# Allegro board proiectcef.brd
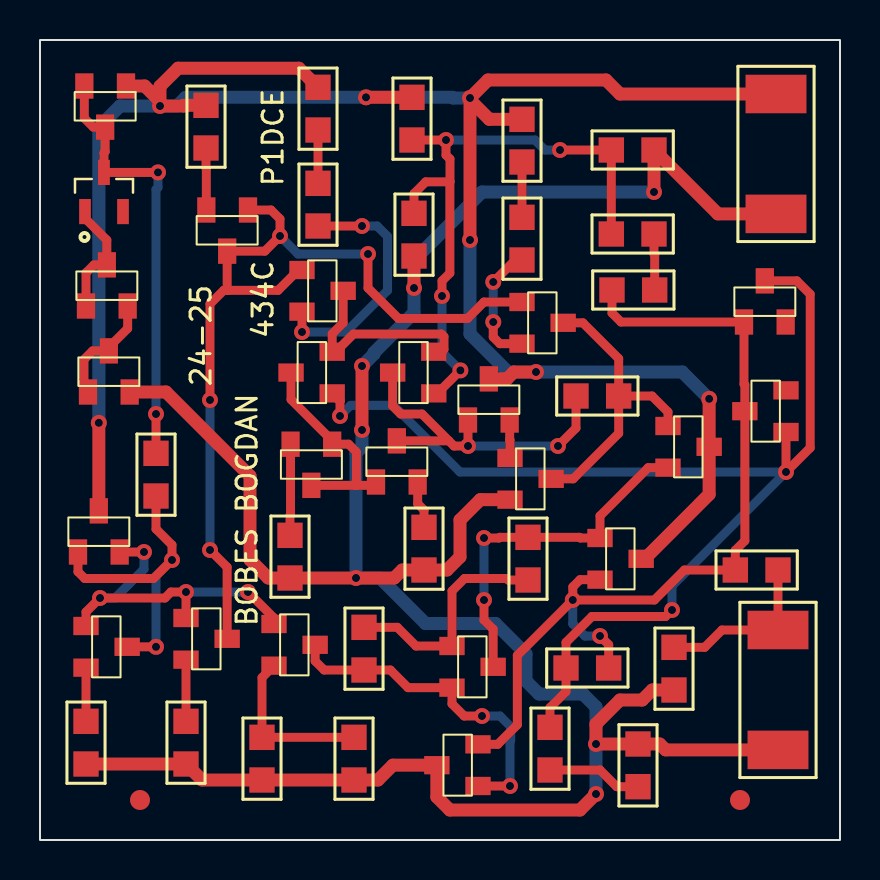
[diagram p0: board, top side]
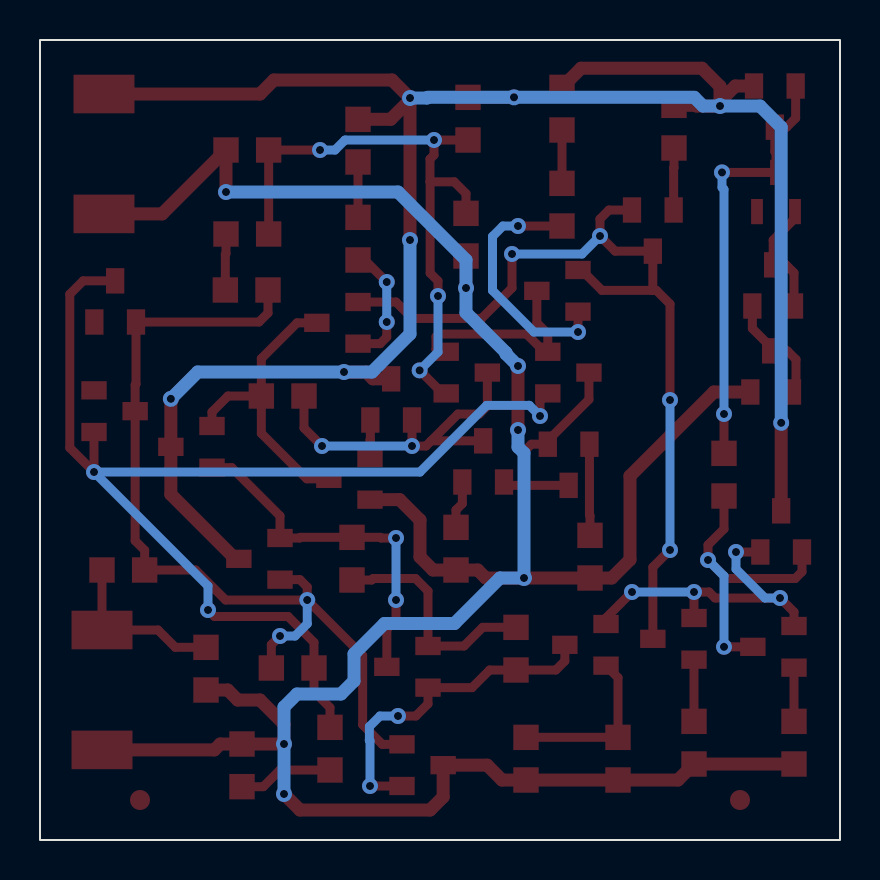
[diagram p1: board, bottom side, seen from below]

Outline 40 x 40 mm; copper layers: TOP, BOTTOM. Coordinates in mm from the lower left corner of the outline.
Outline path: rectangle 0,0 40,40

## Design rules (mm)
nets with their own width: min track width 0.45; nets N09865 N09869 N09873 N09931 N09951 N09955 N10001 N10083 N10129 N10137 N10265 N10327 N10339 N10355 N10375 N10397 N10485 N10501 N10617 N10621 N10625 N10950 N10954 N13013 N13032 N13069 N15102 V+ V- VOUT
nets with their own width: min track width 0.65; nets GND VS+

## Placement (name value [footprint] x y rotation side)
C1  47p  [SMC0805]  26.8 22.2 0 top
C2  2.2n  [SMC0805]  30.7 34.5 180 top
C3  2.2n  [SMC0805]  30.7 30.3 180 top
C4  10u  [SMC0805]  36.9 13.5 180 top
C5  10u  [SMC0805]  29.9 4.8 270 top
D1  BZX84-C6V2,235  [SOT95P230X110-3N]  3.2 32.4 90 top
D4  BZX84C2V7LT1G  [TO236AA]  35.2 25.9 270 top
D5  BZX84C2V7LT1G  [TO236AA]  37.3 20.4 0 top
J1  J309  [TO236AA]  4.3 37.7 90 top
J2  CON2  [SMR2512]  36.8 37.3 270 top
J3  CON2  [SMR2512]  36.9 10.5 270 top
NOREF  -  [unnamed]  5 2 0 top
NOREF#2  -  [unnamed]  35 2 0 top
Q1  BC817-25  [TO236AA]  16.8 17.9 270 top
Q2  BC817-25  [TO236AA]  14.61 19.79 90 top
Q3  BC807-25  [TO236AA]  14.61 22.33 0 top
Q4  BC807-25  [TO236AA]  19.69 22.33 0 top
Q5  BC807-25  [TO236AA]  13.1 28.5 180 top
Q6  BC807-25  [TO236AA]  10.4 31.5 90 top
Q7  BC807-25  [TO236AA]  24.1 26.9 180 top
Q8  BC817-25  [TO236AA]  21.4 21 270 top
Q9  BC817-25  [TO236AA]  23.5 19.1 180 top
Q10  BC817-25  [TO236AA]  31.4 20.7 180 top
Q11  BC817-25  [TO236AA]  28 15.1 180 top
Q12  BC817-25  [TO236AA]  20.6 9.7 180 top
Q13  BC807-25  [TO236AA]  21.9 2.7 0 top
Q14  BC817-25  [TO236AA]  11.7 10.8 180 top
Q15  BC817-25  [TO236AA]  7.3 11.1 180 top
Q16  BC817-25  [TO236AA]  2.3 10.7 180 top
Q17  BC817-25  [TO236AA]  1.9 14.4 270 top
Q18  BC817-25  [TO236AA]  2.4 22.4 270 top
Q19  BC817-25  [TO236AA]  2.3 26.7 270 top
R1  470m  [SMR0805]  12.5 13.1 90 top
R2  470m  [SMR0805]  19.2 13.5 90 top
R3  330  [SMR0805]  8.3 34.6 90 top
R4  100  [SMR0805]  13.9 30.7 90 top
R5  100  [SMR0805]  24.1 29 90 top
R6  1.5k  [SMR0805]  24.4 13 90 top
R7  680  [SMR0805]  16.2 8.5 90 top
R8  150  [SMR0805]  11.1 3 90 top
R9  330  [SMR0805]  7.3 3.8 90 top
R10  330  [SMR0805]  2.3 3.8 90 top
R11  4.7k  [SMR0805]  5.8 17.2 90 top
R12  150  [SMR0805]  15.7 3 90 top
R13  82  [SMR0805]  24.1 33.9 90 top
R14  82  [SMR0805]  13.9 35.5 90 top
R15  10k  [SMR0805]  18.6 35 90 top
R16  10k  [SMR0805]  18.7 29.2 90 top
R17  4.7k  [SMR0805]  28.6 27.5 0 top
R18  22k  [SMR0805]  26.3 8.6 0 top
R19  10k  [SMR0805]  25.5 3.5 90 top
R20  820  [SMR0805]  31.7 7.5 90 top

## Library data of the parts
C1-C5 = C
D1 = BZX84-C6V2,235
D4 = BZX84C2V7LT1G_1
D5 = BZX84C2V7LT1G_0
J1 = J309_1
J2 = CON2_0
J3 = CON2
Q1 Q2 Q8 Q9 Q11 Q12 Q14-Q19 = BC817-25_1
Q3 Q4 Q6 Q7 = BC807-25
Q5 = BC807-25_0
Q10 = BC817-25_2
Q13 = BC807-25_1
R1-R20 = R

## Footprints (pads in the part's own frame, mm; a bottom-side part is the same pattern mirrored in y, then rotated)
SMC0805
  rect 1.27x1.27 smd: 1(0,0) 2(2.134,0)
SMR0805
  rect 1.27x1.27 smd: 1(0,0) 2(2.134,0)
SMR2512
  rect 1.93x3.048 smd: 1(0,0) 2(5.994,0)
SOT95P230X110-3N
  rect 1.26x0.59 smd: 1(-0.98,0.95) 2(-0.98,-0.95) 3(0.98,0)
TO236AA
  rect 1.27x0.914 smd: 1(0,0) 2(0,2.083) 3(-2.057,1.041)
unnamed
  round 1 smd: (0,0)

## Nets
GND: C2.1 C5.1 J2.2 J3.2 Q9.2(E) Q13.3 Q18.2(E) R1.1 R2.1 R8.1 R9.1 R10.1 R12.1 R16.1 R20.1
V+: C2.2 C3.2 Q4.1 R15.1 R16.2
V-: D4.3(K) D5.1 Q3.1 R18.1 R19.2
VOUT: C4.2 D4.1 D5.3(K) Q11.2(E) Q13.2(E) R17.1 R18.2
VS+: J1.1 J2.1 Q8.3 Q10.3 Q11.3 Q17.3 R3.2 R13.2 R14.2 R15.2
N09865: Q6.2(E) R3.1
N09869: Q5.2(E) R4.1
N09873: Q7.2(E) R5.1
N09931: Q5.1 Q6.1 Q6.3 Q7.1 Q15.3
N09951: Q3.2(E) Q4.2(E) Q5.3
N09955: C1.2 Q7.3 Q9.3 Q10.1
N10001: D1.3(C) J1.2(S) J1.3 R11.2
N10083: C1.1 Q1.3 Q4.3 Q8.1
N10129: Q1.1 Q2.1 Q2.3 Q3.3
N10137: Q10.2(E) Q11.1 Q12.3 R6.2
N10265: Q8.2(E) Q9.1
N10327: Q12.1 R6.1 R7.2
N10339: D1.1 Q19.1 Q19.3
N10355: Q16.3 Q17.1 R11.1
N10375: Q12.2(E) Q13.1 Q14.3 R7.1
N10397: Q2.2(E) R1.2
N10485: Q14.1 Q15.1 Q16.1 Q17.2(E)
N10501: Q18.1 Q18.3 Q19.2(E)
N10617: Q16.2(E) R10.2
N10621: Q15.2(E) R9.2
N10625: Q14.2(E) R8.2 R12.2
N10950: R4.2 R14.1
N10954: R5.2 R13.1
N13013: C5.2 R19.1
N13032: C4.1 J3.1 R20.2
N13069: C3.1 R17.2
N15102: Q1.2(E) R2.2

Pads without a net: D1 2; D4 2; D5 2

## Via types
v1: diameter 0.8, hole 0.4, TOP to BOTTOM, 45 vias

## Routing (per net, layer and track width the routed paths; a pad name or vN(x,y) marks a point on that pad's centre or on a via; arc(x,y) is an arc through that point)
GND: length 132.6
  TOP w0.65: v1(30.7,32.4) C2.1 33.89,31.31 J2.2 ; R16.1 v1(18.7,27.6) ; J3.2 31.28,4.51 30.99,4.8 C5.1 v1(27.8,4.8) 27.8,5.8 29,7 30.11,7 30.61,7.5 R20.1 ; R10.1 R9.1 8.1,3 R8.1 R12.1 16.9,3 17.64,3.74 Q13.3 19.84,2.15 20.49,1.5 27,1.5 v1(27.8,2.3) ; Q18.2 6.3,22.4 10.5,18.2 10.5,14.01 11.41,13.1 R1.1 v1(15.8,13.1) 17.71,13.1 18.11,13.5 R2.1 20.35,13.5 21,14.15 21,16 22.02,17.02 Q9.2 ; v1(16.1,20.5) v1(16.1,23.7)
  BOTTOM w0.65: v1(16.1,23.7) 16.7,24.3 16.7,24.37 18.7,26.37 v1(18.7,27.6) 18.7,29 22.1,32.4 v1(30.7,32.4) ; v1(27.8,2.3) v1(27.8,4.8) 27.8,6.65 27.15,7.3 24.95,7.3 24.3,7.95 24.3,9.3 22.77,10.82 19.27,10.82 17,13.1 v1(15.8,13.1) 15.8,19.35 16.1,19.65 v1(16.1,20.5)
V+: length 31.4
  TOP w0.45: R15.1 v1(20.3,35) 20.3,34.25 20.5,34.05 20.5,32.92 20.49,32.91 ; v1(21.02,23.48) 19.87,22.33 Q4.1 ; 20.49,32.91 19.29,32.91 18.7,32.32 R16.2 ; 20.49,32.91 20.49,28.35 20.1,27.95 v1(20.1,27.2) ; C3.2 C2.2 v1(26,34.5)
  BOTTOM w0.45: v1(21.02,23.48) 20.1,24.4 v1(20.1,27.2) ; v1(26,34.5) 25.25,34.5 24.75,35 v1(20.3,35)
V-: length 58.9
  TOP w0.45: v1(15,21.2) 15,21.94 Q3.1 ; D4.3 37.84,27.96 38.51,27.29 38.51,19.61 v1(37.3,18.4) D5.1 ; R19.2 25.5,6.62 26.3,7.42 R18.1 26.3,9.88 27.6,11.18 31.27,11.18 v1(31.6,11.5)
  BOTTOM w0.45: v1(31.6,11.5) 31.6,12.7 v1(37.3,18.4) 21,18.4 17.67,21.73 15.53,21.73 v1(15,21.2)
VOUT: length 45.8
  TOP w0.45: v1(28,10.2) 28.43,9.77 R18.2 ; Q13.2 22.89,4.78 23.87,5.76 23.87,9.23 v1(26.64,12) ; Q11.2 27,13.02 26.64,12.65 v1(26.64,12) ; v1(26.64,12) 30.72,12 32.22,13.5 C4.2 34.77,14.49 35.24,14.96 D5.3 35.24,22.76 35.2,22.8 D4.1 29.05,25.9 28.6,26.35 R17.1
  BOTTOM w0.45: v1(26.64,12) 26.64,10.81 27.25,10.2 v1(28,10.2)
VS+: length 110.7
  TOP w0.65: v1(24.8,23.4) 23.69,23.4 23.35,23.06 Q8.3 ; Q17.3 v1(2.94,20.86) ; J2.1 29,37.3 28.3,38 22.4,38 v1(21.5,37.1) 21.5,37 ; Q11.3 30.24,14.06 33.46,17.28 Q10.3 v1(33.46,22.06) ; R3.2 7.21,36.73 7.18,36.7 v1(6,36.7) 6,36.93 ; 6,36.93 6,37.69 6.9,38.59 12.95,38.59 R14.2 ; 6,36.93 5.23,37.7 J1.1 ; 21.5,37 v1(21.5,30) ; 21.5,37 22.47,36.03 R13.2 ; v1(16.3,37.13) R15.2
  BOTTOM w0.65: v1(2.94,20.86) 2.94,35.64 4,36.7 v1(6,36.7) 6.85,36.7 7.29,37.13 v1(16.3,37.13) 20.61,37.13 20.65,37.1 v1(21.5,37.1) ; v1(33.46,22.06) 32.11,23.4 v1(24.8,23.4) 23.4,23.4 21.5,25.3 v1(21.5,30)
N09865: length 3.1
  TOP w0.45: R3.1 8.3,33.61 8.32,33.6 Q6.2
N09869: length 12.5
  TOP w0.45: R4.1 v1(16.1,30.7) ; Q5.2 v1(13.1,25.4)
  BOTTOM w0.45: v1(16.1,30.7) 16.85,30.7 17.38,30.18 17.38,27.48 15.3,25.4 v1(13.1,25.4)
N09873: length 6.2
  TOP w0.45: v1(22.66,27.9) 23.76,29 R5.1 ; Q7.2 22.99,24.82 22.66,25.15 v1(22.66,25.9)
  BOTTOM w0.45: v1(22.66,25.9) v1(22.66,27.9)
N09931: length 45.1
  TOP w0.45: Q5.1 12.92,28.5 11.9,27.48 9.38,27.48 ; Q7.1 22.2,26.9 21.38,26.08 17.92,26.08 16.4,27.6 v1(16.4,29.3) ; Q15.3 9.36,13.64 v1(8.5,14.5) ; Q6.1 11.55,31.5 12,31.05 v1(12,30.2) 11.24,29.44 Q6.3 9.36,27.5 9.38,27.48 ; v1(8.5,22) 8.5,26.8 9.18,27.48 9.38,27.48
  BOTTOM w0.45: v1(16.4,29.3) 12.9,29.3 v1(12,30.2) ; v1(8.5,22) v1(8.5,14.5)
N09951: length 10.5
  TOP w0.45: Q5.3 15.16,25.86 14.61,25.31 Q3.2 14.79,24.41 15.68,25.3 20.07,25.3 20.2,25.17 20.2,24.53 20.08,24.41 Q4.2
N09955: length 15.1
  TOP w0.45: Q9.3 26.66,18.06 28.93,20.33 C1.2 ; C1.2 30.6,22.2 31.4,21.4 Q10.1 ; C1.2 28.93,24.07 27.14,25.86 Q7.3
N10001: length 21.9
  TOP w0.45: J1.2 2.22,36.09 2.67,35.64 J1.3 3.26,34.42 3.2,34.36 D1.3 v1(5.9,33.38) ; v1(5.8,21.3) R11.2
  BOTTOM w0.45: v1(5.9,33.38) 5.9,32.63 5.8,32.53 v1(5.8,21.3)
N10083: length 17.5
  TOP w0.45: 20.44,19.96 Q1.3 ; 20.44,19.96 20.7,19.7 v1(21.4,19.7) Q8.1 ; 20.44,19.96 19.1,21.3 18.03,21.3 17.63,21.7 Q4.3 ; C1.1 26.8,20.6 v1(25.9,19.7)
  BOTTOM w0.45: v1(25.9,19.7) v1(21.4,19.7)
N10129: length 10.8
  TOP w0.45: 15.8,17.73 15.82,17.75 15.82,19.4 15.43,19.79 Q2.1 14.61,19.97 12.55,22.03 Q3.3 ; 15.8,17.73 Q2.3 ; 15.8,17.73 16.63,17.73 Q1.1
N10137: length 18
  TOP w0.45: v1(22.2,15.1) 22.95,15.1 22.99,15.13 R6.2 26.98,15.13 27.01,15.1 Q11.1 28,16.2 30.41,18.62 Q10.2 ; v1(22.2,12) 22.2,11 22.66,10.54 Q12.3
  BOTTOM w0.45: v1(22.2,12) v1(22.2,15.1)
N10265: length 1.9
  TOP w0.45: Q8.2 23.48,20.01 23.5,20 Q9.1
N10327: length 11.6
  TOP w0.45: R6.1 23.41,13 23.34,13.07 21.23,13.07 20.6,12.45 Q12.1 18.8,9.7 17.87,10.63 R7.2
N10339: length 6
  TOP w0.45: D1.1 2.25,31.09 3.34,29.99 Q19.3 2.7,28.76 2.3,28.36 Q19.1
N10355: length 15.9
  TOP w0.45: R11.1 5.8,15.55 6.6,14.75 v1(6.6,14) 5.67,13.07 2.24,13.07 1.9,13.41 Q17.1 ; Q16.3 v1(5.8,9.66)
  BOTTOM w0.45: v1(6.6,14) 5.8,13.2 v1(5.8,9.66)
N10375: length 17
  TOP w0.45: Q14.3 13.76,8.95 14.21,8.5 R7.1 17.52,8.5 18.4,7.62 Q12.2 20.6,6.81 21.21,6.2 v1(22.1,6.2) ; Q13.1 v1(23.5,2.7)
  BOTTOM w0.45: v1(23.5,2.7) 23.5,4.95 23.53,4.98 23.53,5.67 23,6.2 v1(22.1,6.2)
N10397: length 4.6
  TOP w0.45: Q2.2 12.53,16.25 12.5,16.22 R1.2
N10485: length 17.5
  TOP w0.45: Q17.2 v1(5.2,14.4) ; Q16.1 2.3,11.4 v1(3,12.1) 6.25,12.1 6.55,12.4 v1(7.3,12.4) Q15.1 ; v1(10.4,12.4) 11.7,11.1 Q14.1
  BOTTOM w0.45: v1(5.2,14.4) 5.2,13.55 3.75,12.1 v1(3,12.1) ; v1(10.4,12.4) v1(7.3,12.4)
N10501: length 5.8
  TOP w0.45: Q19.2 4.38,25.58 3.44,24.64 Q18.3 2.63,24.46 2.2,24.03 2.2,22.6 Q18.1
N10617: length 2.7
  TOP w0.45: R10.2 Q16.2
N10621: length 3.1
  TOP w0.45: Q15.2 R9.2
N10625: length 8.4
  TOP w0.45: R12.2 R8.2 11.1,8.12 Q14.2
N10950: length 2.7
  TOP w0.45: R4.2 R14.1
N10954: length 2.8
  TOP w0.45: R13.1 R5.2
N13013: length 4.7
  TOP w0.45: R19.1 28,3.5 28.83,2.67 C5.2
N13032: length 8.6
  TOP w0.45: C4.1 J3.1 34.1,10.5 33.23,9.63 R20.2
N13069: length 2.8
  TOP w0.45: R17.2 30.73,29.28 30.7,29.31 C3.1
N15102: length 2.4
  TOP w0.45: Q1.2 18.88,16.82 19.2,16.5 19.2,15.63 R2.2

## Text on the board
Ref Des/Silkscreen Top: 24-25 | BOBES BOGDAN | 434C | P1DCE
XSECTION_CHART: *  SURFACE | L1 TOP CONDUCTOR | *  DIELECTRIC | L2 BOTTOM CONDUCTOR | DESIGN CROSS SECTION CHART | ___________________________ | TOTAL THICKNESS 0.26416 MM | 1-2
NCLEGEND-1-2: FIGURE | FINISHED_SIZE | 0.4 | DRILL CHART: TOP to BOTTOM | ALL UNITS ARE IN MILLIMETERS | PLATED | QTY | 48
